# Altium PCB Line.PcbDoc
Units mm, origin at the board's own origin, x right, y up, seen from the top; angles counter-clockwise.
Board outline 55.25 x 23 mm, 2 copper layers (Top Layer, Bottom Layer); 22 components, 18 nets, 98 pads, 18 vias.
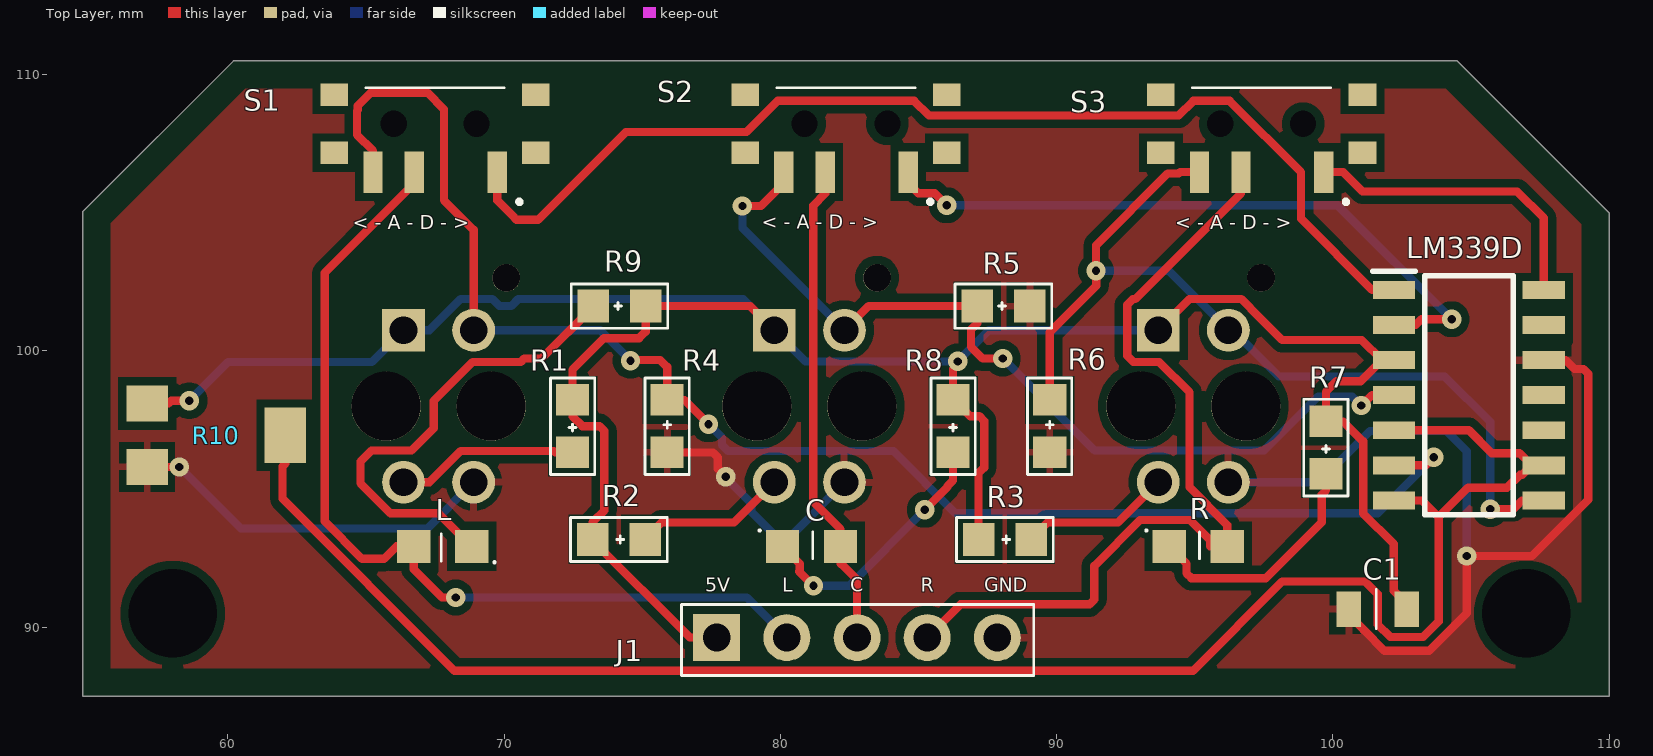
[diagram p0: Top Layer view]
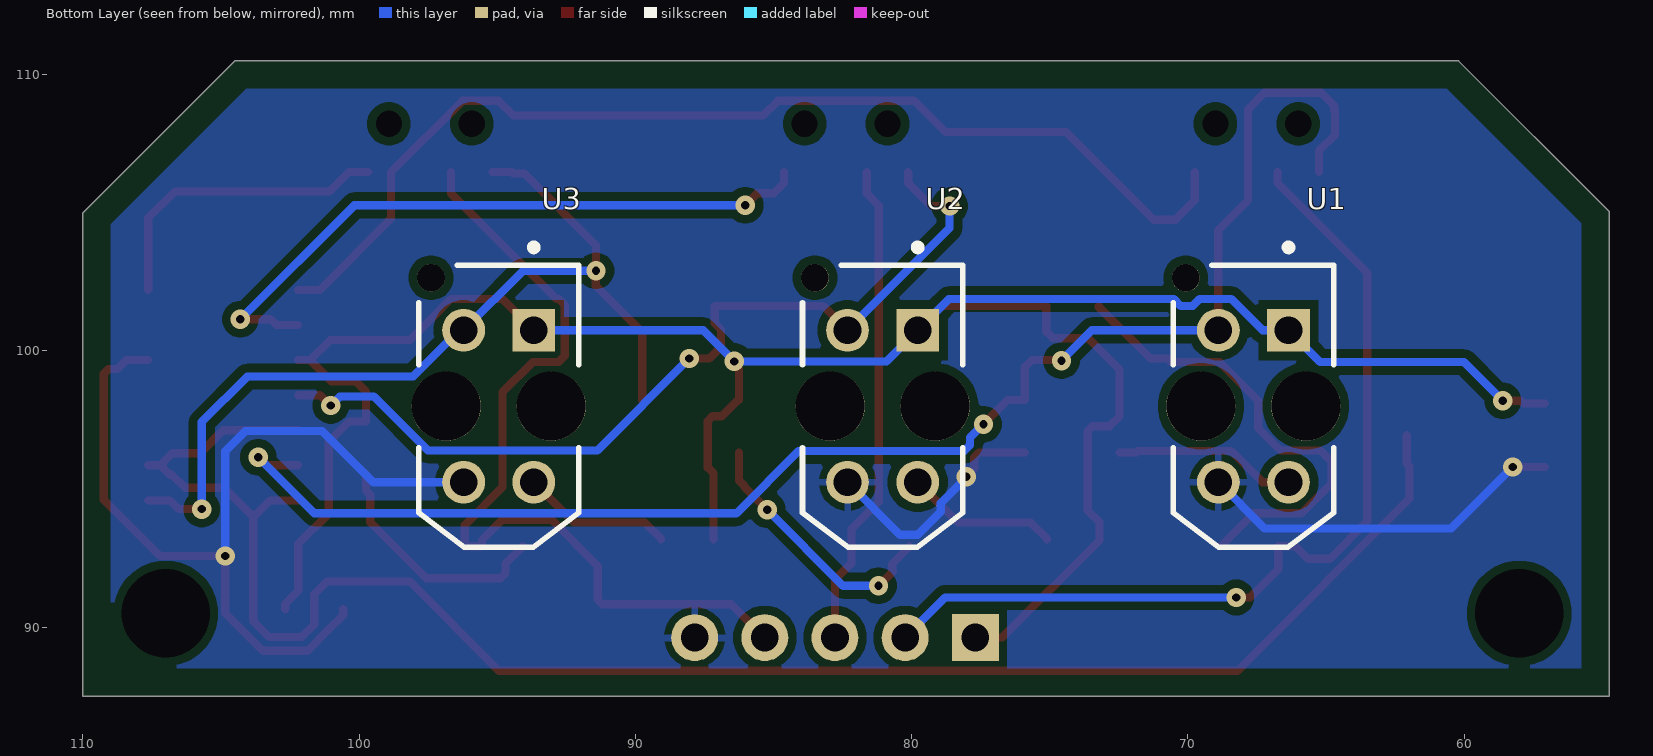
[diagram p1: Bottom Layer view, seen from below]
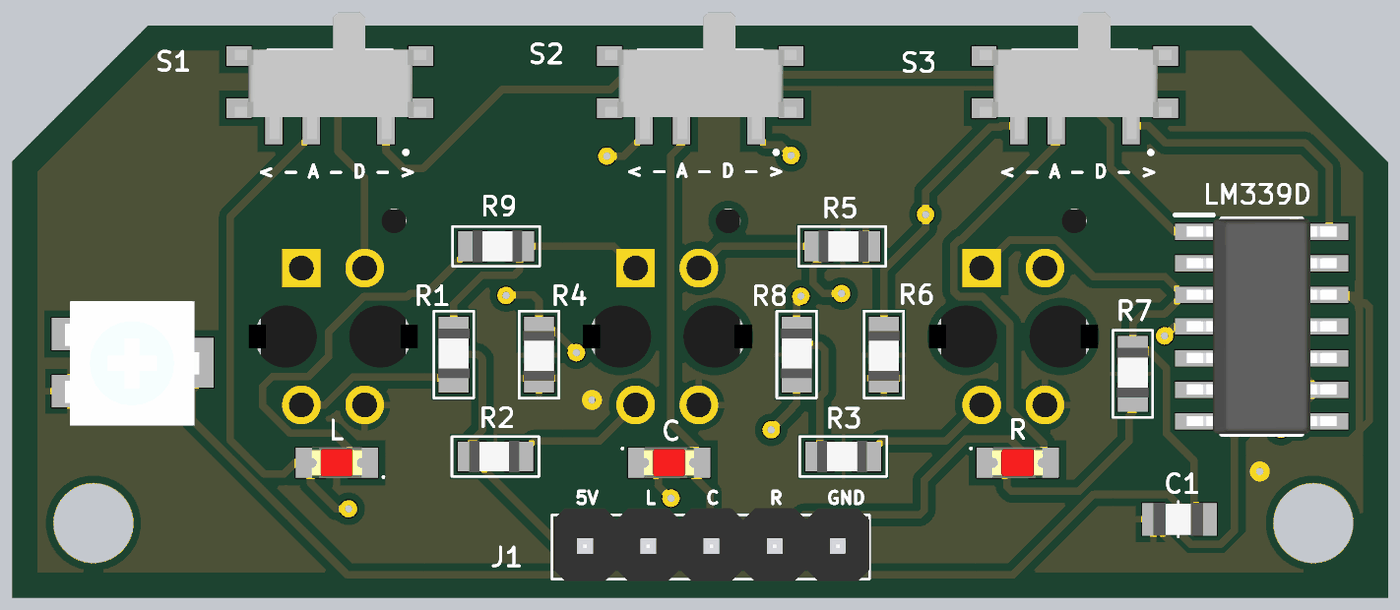
[diagram p2: 3D render of the assembled board from above, using the file's embedded part models]
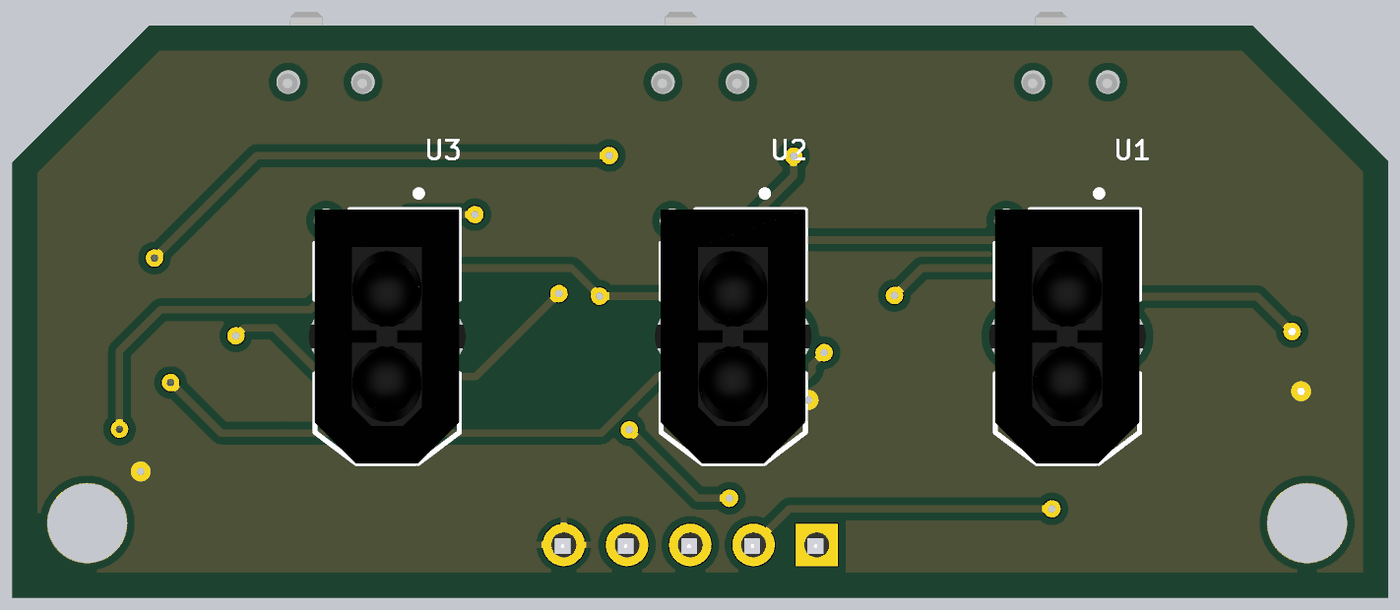
[diagram p3: 3D render of the assembled board from below, using the file's embedded part models]

## Layer stack, top to bottom
Top Solder: solder mask 0.0102, Solder Resist, Dk 3.5
Top Layer: signal copper 0.0356
Dielectric 1: dielectric 0.32, FR-4, Dk 4.8
Bottom Layer: signal copper 0.0356
Bottom Solder: solder mask 0.0102, Solder Resist, Dk 3.5

## Board outline
54.75,87.5 110,87.5 110,105 104.512,110.487 104.5,110.5 60.2,110.5 54.762,105.063 54.75,105.05

## Design rules (kind name [scope] priority, off if disabled: settings)
AcuteAngle [All] p1: minimum=6.00000000000000E+0001 checktracksonly=TRUE
AssemblyTestPointUsage [(not InNetClass('NOTESTPOINTS'))] p1: allowmultiple=TRUE
AssemblyTestPointUsage AssemblyTestPointUsageN [InNetClass('NOTESTPOINTS')] p2: valid=2 allowmultiple=TRUE
AssemblyTestpoint [All] p1: testpointundercomponent=TRUE minsize=0.8 maxsize=2 preferedsize=1 minholesize=0 maxholesize=0.35 preferedholesize=0 testpointgrid=1.27 usegrid=FALSE gridoriginx=87.5 gridoriginy=62.5 gridtolerance=0 allowsidetop=TRUE minspacing=2.54 // Zollner
BoardOutlineClearance BoardCopperOutlineClearance [(OnLayer('Top Layer') OR OnLayer('Bottom Layer') )] p1: gap=0.5 ignorepadtopadclearanceinfootprint=FALSE except(0.75: THPad-OutlineEdge; 0.8: SMDPad-OutlineEdge; 1: Poly-OutlineEdge Region-OutlineEdge)
Clearance PadToViaClearance [IsVia and not IsComponentVia vs IsPad] p1: gap=0.025 ignorepadtopadclearanceinfootprint=TRUE
Clearance "Clearance (FAB)" [All] p2: gap=0.203 ignorepadtopadclearanceinfootprint=TRUE except(0.305: Arc-Poly Track-Poly SMDPad-Poly THPad-Poly Via-Poly Fill-Poly Poly-Poly)
ComponentClearance ComponentClearance_NetTie [((ObjectKind = 'Component') And (ComponentType = 'Net Tie')) Or (Footprint = 'StarPoint') Or (Footprint like 'NetTieVia*')] p1: gap=-3.81 collisioncheckmode=3 verticalgap=-3.81 showdistances=FALSE
ComponentClearance [All] p2: gap=0.254 collisioncheckmode=3 verticalgap=0.254 showdistances=FALSE
DiffPairsRouting [All] p1: maxlimit=1.27 minlimit=0.203 mostfreqgap=0.203 toplayer_minwidth=0.152 toplayer_maxwidth=2.54 toplayer_prefwidth=0.254 bottomlayer_minwidth=0.152 bottomlayer_maxwidth=2.54 bottomlayer_prefwidth=0.254 maxuncoupledlength=12.7
FabricationTestPointUsage [All] p1: valid=2 allowmultiple=FALSE
FabricationTestpoint [All] p1: side=3 testpointundercomponent=TRUE minsize=1.016 maxsize=2.54 preferedsize=1.524 minholesize=0 maxholesize=1.016 preferedholesize=0.813 testpointgrid=0.025 allowsidetop=TRUE allowsidebottom=TRUE usegrid=FALSE gridtolerance=0
HoleSize [All] p1: absolutevalues=TRUE maxlimit=6.35 minlimit=0.3 maxpercent=80.000 minpercent=20.000 // Zollner
HoleToHoleClearance HoleToHoleClearance_NetTieVia [InPadClass('NetTieVias') vs InPadClass('NetTieVias')] p1: gap=0 allowstackedmicrovias=TRUE
HoleToHoleClearance [All] p2: gap=0.25 allowstackedmicrovias=TRUE // Zollner
MinimumAnnularRing [All] p1: minimumring=0.15 // PCBWAY
MinimumSolderMaskSliver [All] p1: minsoldermaskwidth=0.2 // Zollner
PlaneClearance PlaneClearance_1 [All] p1: clearance=0.508
PlaneConnect [All] p1: pad.planeconnectstyle=Relief pad.reliefexpansion=0.508 pad.reliefentries=4 pad.reliefconductorwidth=0.254 pad.reliefairgap=0.254 via.planeconnectstyle=Direct via.reliefexpansion=0.508 via.reliefentries=4 via.reliefconductorwidth=0.254 via.reliefairgap=0.254
PolygonConnect [All] p1: thpad.connectstyle=Relief thpad.reliefconductorwidth=0.254 thpad.reliefentries=4 thpad.polygonreliefangle="90 Angle" thpad.airgapwidth=0.254 smdpad.connectstyle=Relief smdpad.reliefconductorwidth=0.254 smdpad.reliefentries=4 smdpad.polygonreliefangle="90 Angle" smdpad.airgapwidth=0.254 via.connectstyle=Direct via.reliefconductorwidth=0.254 via.reliefentries=4 via.polygonreliefangle="90 Angle" via.airgapwidth=0.254
RoutingVias [All] p1: holewidth=0.3 width=0.7 viastyle="Through Hole" minholewidth=0.3 minwidth=0.6 maxholewidth=1.27 maxwidth=1.27
SMDEntry [not IsTestpoint] p1: side=TRUE corner=TRUE anyangle=FALSE
SMDNeckDown [not IsTestpoint] p1: percent=90.000
SMDToCorner [All] p1: distance=10000
SMDToPlane [All] p1: distance=0
ShortCircuit [All vs not IsBoardCutoutRegion] p1: allowed=FALSE
SilkToSolderMaskClearance [IsPad] p1: minsilkscreentomaskgap=0.127 clearancetoexposedcopper=TRUE
SolderMaskExpansion [All] p1: expansion=0.05 istentingtop=FALSE // Zollner
SolderMaskExpansion SolderMaskExpansionToHoles [All] p2: expansion=0.1 istentingtop=FALSE soldermaskfromhole=TRUE // Zollner
UnRoutedNet [All] p1: checkbadconnections=TRUE
Width [All] p1: maxlimit=12.7 minlimit=0.203 preferedwidth=0.3 minimp=50.000000 maximp=50.000000 favimp=50.000000
16 further rules are at their usual default settings.

## Components (designator, comment, footprint, x,y, rotation, side; value= is the part's Value field where it differs from the comment)
C "LED 0805" "LED 0805" 80.075,92.925 r0 top (schematic designator D2)
C1 "100nF" C0805 102.775,90.65 r180 top
J1 "1x5 MALE HEADER" "1X5 MALE HEADER" 82.775,89.6 r0 top
L "LED 0805" "LED 0805" 68.825,92.925 r180 top (schematic designator D3)
LM339D "LM339D" LM339D 104.925,98.4 r0 top (schematic designator U4)
R "LED 0805" "LED 0805" 94.075,92.925 r0 top (schematic designator D1)
R1 "220" "R0805 RESISTOR" 72.475,98.225 r270 top
R2 "220" "R0805 RESISTOR" 73.2,93.175 r0 top
R3 "220" "R0805 RESISTOR" 87.175,93.175 r0 top
R4 "10k" "R0805 RESISTOR" 75.9,96.325 r90 top
R5 "10k" "R0805 RESISTOR" 89.025,101.625 r180 top
R6 "10k" "R0805 RESISTOR" 89.75,96.325 r90 top
R7 "220" "R0805 RESISTOR" 99.75,97.45 r270 top
R8 "220" "R0805 RESISTOR" 86.25,98.225 r270 top
R9 "220" "R0805 RESISTOR" 75.125,101.625 r180 top
R10 "TRIMPOT 5mm" "TRIMPOT 5MM" 56.95,100.05 r270 top
S1 "SMD SLİDE SWİTCH" "SMD SLIDE SWITCH" 67.627,108.225 r180 top
S2 "SMD SLİDE SWİTCH" "SMD SLIDE SWITCH" 82.5,108.225 r180 top
S3 "SMD SLİDE SWİTCH" "SMD SLIDE SWITCH" 97.55,108.225 r180 top
U1 "TCRT5000" TCRT5000 67.625,98 r270 bottom
U2 "TCRT5000" TCRT5000 81.05,98 r270 bottom
U3 "TCRT5000" TCRT5000 94.95,98 r270 bottom

## Footprints (in the part's own frame and the unit in brackets; to place one, negate y for a bottom-side part, rotate by r counter-clockwise, add the part's x,y. Pads: shape width x height; smd on the part's side, far side on the other; paste and mask are expansions set on the pad)
"1X5 MALE HEADER" [mm]
  rect 1.7x1.7 hole 1 mask+0.05: 1(-5.08,0.025)
  round 1.7 hole 1 mask+0.05: 2(-2.54,0.025) 3(0,0.025) 4(2.54,0.025) 5(5.08,0.025)
  silkscreen extent -6.35,-1.35 6.4,1.23, body extent -6.3,-1.43 6.4,1.49, height 8.51
C0805 [mm] "C0805 CAPACITOR"
  rect 0.9x1.3 smd: 1(0.1,0) 2(2.2,0)
  silkscreen extent 1.2,-0.72 1.2,0.7, body extent 0.2,-0.66 2.2,0.65, height 0.73
"LED 0805" [mm]
  rect 1.2x1.2 smd: 1(0,0) 2(2.1,0)
  silkscreen extent -0.85,-0.45 1.1,0.6, body extent 0.04,-0.63 2.06,0.63, height 1.1
LM339D [mm] "LM339 Comparator"
  rect 1.525x0.65 smd: 1(-2.712,3.81) 2(-2.712,2.54) 3(-2.712,1.27) 4(-2.712,0) 5(-2.712,-1.27) 6(-2.712,-2.54) 7(-2.712,-3.81) 8(2.712,-3.81) 9(2.712,-2.54) 10(2.712,-1.27) 11(2.712,0) 12(2.712,1.27) 13(2.712,2.54) 14(2.712,3.81)
  silkscreen extent -3.48,-4.33 1.6,4.48, body extent -3.01,-4.32 3.01,4.34, height 1.75
"R0805 RESISTOR" [mm]
  rect 1.14x1.2 smd: 1(0,0) 2(1.9,0)
  silkscreen extent -0.8,-0.8 2.7,0.8, body extent -0.1,-0.63 1.9,0.63, height 0.43
"SMD SLIDE SWITCH" [mm] "SMD Slide Switch right angle"
  rect 0.7x1.5 smd: 1(2.377,1.75) 2(0.877,1.75) 3(-2.123,1.75)
  rect 1x0.8 smd: GND(-3.523,-1.05) GND(-3.523,1.05) GND(3.777,-1.05) GND(3.777,1.05)
  round 0.475 hole 0.95 unplated: MH1(-1.373,0) MH2(1.627,0)
  silkscreen extent -2.97,-1.3 2.63,2.88, body extent -3.75,-2.8 3.95,2.29, height 1.4
TCRT5000 [mm] "TCRT5000 Kızıl Ötesi Sensör"
  rect 1.55x1.55 hole 1 paste-1000 mask+0: 1(-2.75,1.27)
  round 1.55 hole 1 paste-1000 mask+0: 2(2.75,1.27) 3(-2.75,-1.27) 4(2.75,-1.27)
  round 1 hole 1 unplated paste-1000 mask+0: ""(-4.65,-2.45)
  round 2.5 hole 2.5 unplated paste-1000 mask+0: ""(0,-1.9) ""(0,1.9)
  silkscreen extent -5.87,-2.9 5.1,2.9, body extent -5.1,-3.41 5.1,3.39, height 7.13
"TRIMPOT 5MM" [mm] "5mm Square Trimpot"
  rect 1.3x1.5 smd mask+0.05: 1(4.25,0.125) 3(1.95,0.125)
  rect 2x1.5 smd mask+0.05: 2(3.1,5.125)
  body extent 0.63,-0.1 5.63,5.3, height 2.8

## Part data
C1: library part C0805
LM339D: "LM33D Voltage Comparator"
R1 R2 R3 R4 R5 R6 R7 R8 R9: library part "R0805 Resistor"
R10: "TS53 TRIMPOT SMD 5mm"
U1 U2 U3: "TCRT5000 Kızıl Ötesi Sensör", Current - Collector=100mA, Current - DC Forward=60mA, Digikey Part Number=751-1033-5-ND, Manufacturer=Vishay, Mouser Part Number=782-TCRT5000, Package=PTH_SENSOR_10MM2_5MM8, Temperature="-25°C to +85°C", Temperature Range High=+85°C, Temperature Range Low=-25°C, Voltage - Collector Emitter Breakdown=70V, ComponentLink1Description=Upverter, ComponentLink1URL=https://upverter.com/upn/revision/6a006743d406fff5/, ComponentLink2Description=Datasheet, ComponentLink2URL=http://www.vishay.com/doc?83760, Digikey Description="IC SENSOR OPTO TRANS 15MM REFL PCB", helpURL=https://upverter.com/upn/revision/6a006743d406fff5/, Lead Free=yes, Part Number=TCRT5000, Price=0.712554698297, RoHS=TRUE, Supplier 1=Digi-Key, Supplier 2=Mouser, Supplier Part Number 1=751-1033-5-ND, Supplier Part Number 2=782-TCRT5000

## Free pads (board coordinates)
  oval 0.55x0.5 hole 3.2 mask+0.05: 4(58,90.5) 5(107,90.5)

## Via types
v1: diameter 0.7, hole 0.3, Top Layer to Bottom Layer, 18 vias

## Nets (pads, with @x,y where several pads share a name; then routed paths per layer and width w, separated by ;. In a path a pad name is that pad's centre, name@x,y a point inside that pad or via, vN(x,y) a via of type N, cw(c..) or ccw(c..) an arc to the next point about the centre after c; other vN are vias at no path point)
+5: C1.1 J1.1 LM339D.3 R1.1 R2.1 R3.1 R7.1 R8.1 R9.1 R10.3 U1.1 U2.1 U3.1 | length 91.2
  Top Layer w0.3: R10.3 57.85,98.1 57.95,98.2 v1(58.6,98.2) ; J1.1 76.72,89.625 73.2,93.145 R2.1 73.2,93.8 73.625,94.225 73.625,97.099 73.449,97.275 72.83,97.275 72.475,97.63 72.475,99.325 73.612,100.462 74.888,100.462 75.125,100.7 75.125,101 R9.1 78.905,101.625 U2.1 ; v1(86.418,99.622) 86.418,99.514 86.25,99.346 R8.1 86.28,98.225 86.868,97.637 87.199,97.637 87.375,97.461 87.375,95.775 87.175,95.575 R3.1 ; U3.1 94.808,101.878 96.687,101.878 97.348,101.217 98.166,100.4 101.046,100.4 LM339D.3@101.776,99.67 ; LM339D.3 LM339D.3@101.776,99.67 ; C1.1 102.675,90.85 102.207,91.318 102.207,93.009 101.097,94.119 101.097,96.728 100.375,97.45 R7.1 99.75,98.525 100.131,98.906 101.011,98.906 LM339D.3@101.776,99.67
  Bottom Layer w0.3: v1(58.6,98.2) 60.003,99.603 65.208,99.603 U1.1 67.299,100.75 68.428,101.878 69.572,101.878 69.825,101.625 70.257,101.625 70.51,101.878 78.652,101.878 U2.1 80.908,99.622 v1(86.418,99.622) 87.546,100.75 U3.1
CENTER_A: LM339D.4 R5.2 S2.1 U2.3 | length 33
  Top Layer w0.3: v1(78.625,105.25) 79.298,105.25 80.123,106.075 S2.1 ; U2.3 83.195,101.625 R5.2 87.125,101 86.9,100.775 86.9,100.15 87.325,99.725 v1(88.05,99.725) ; v1(101.025,98.025) 101.05,98.025 101.425,98.4 LM339D.4
  Bottom Layer w0.3: v1(78.625,105.25) 78.625,104.445 U2.3 ; v1(88.05,99.725) 91.378,96.397 97.514,96.397 99.467,98.35 100.7,98.35 v1(101.025,98.025)
CENTER_D: LM339D.2 S2.3 | length 24.3
  Top Layer w0.3: S2.3 84.623,106.075 84.991,105.707 85.593,105.707 v1(86.025,105.275) ; LM339D.2 103.001,100.94 103.211,101.15 v1(104.3,101.15)
  Bottom Layer w0.3: v1(86.025,105.275) 100.175,105.275 v1(104.3,101.15)
CENTER_SIGNAL: C.2 J1.3 S2.2 | length 17.7
  Top Layer w0.3: S2.2 81.623,105.7 81.192,105.268 81.192,94.534 82.175,93.55 C.2 82.175,92.3 ; J1.3 82.775,91.725 82.2,92.3 ; 82.175,92.3 82.2,92.3 ; 82.175,92.3 82.2,92.3
CMPR: LM339D.5 LM339D.7 LM339D.9 R10.2 | length 66.1
  Top Layer w0.3: R10.2 62.075,95.925 61.975,95.825 61.975,94.65 68.203,88.422 94.933,88.422 98.165,91.653 101.171,91.653 101.625,91.2 101.625,90.101 102.079,89.647 103.271,89.647 103.832,90.207 103.832,93.982 ; LM339D.7 103.224,94.59 103.832,93.982 ; LM339D.5 104.92,97.13 105.75,96.3 106.76,96.3 107.115,95.945 107.115,95.86 LM339D.9 107.2,95.86 106.857,95.517 106.772,95.517 106.305,95.05 104.9,95.05 103.832,93.982
GND: C1.2 J1.5 LM339D.12 R4.1 R5.1 R6.1 R10.1 U1.4 U2.4 U3.4 | length 55.1
  Top Layer w0.3: R10.1 v1(58.242,95.8) ; R4.1 77.556,96.325 77.736,96.145 77.736,95.739 v1(78.025,95.45) ; C1.2 100.575,90.45 101.122,89.903 101.122,89.892 101.87,89.144 103.48,89.144 104.85,90.514 v1(104.85,92.575) 107.209,92.575 109.25,94.616 109.25,99.174 109.074,99.35 108.745,99.35 108.425,99.67 LM339D.12
  Bottom Layer w0.3: v1(58.242,95.8) 60.469,93.574 67.219,93.574 U1.4 ; v1(78.025,95.45) 78.025,95.409 78.941,94.493 78.941,94.185 79.781,93.345 80.415,93.345 U2.4 ; U3.4 99.492,95.25 101.342,97.1 104.119,97.1 104.85,96.369 v1(104.85,92.575)
LEFT_A: LM339D.6 R4.2 S1.1 U1.3 | length 55.4
  Top Layer w0.3: S1.1 65.25,107.25 64.675,107.825 64.675,108.701 64.703,108.729 64.703,108.878 65.174,109.349 67.226,109.349 67.825,108.75 67.825,105.454 68.895,104.384 U1.3 ; v1(74.575,99.65) 74.6,99.675 75.65,99.675 75.9,99.425 R4.2 76.525,98.225 v1(77.4,97.35) ; LM339D.6 103.36,95.86 v1(103.65,96.15)
  Bottom Layer w0.3: U1.3 73.475,100.75 v1(74.575,99.65) ; v1(77.4,97.35) 77.885,96.865 77.885,96.59 78.097,96.378 84.091,96.378 86.348,94.122 101.622,94.122 v1(103.65,96.15)
LEFT_D: LM339D.1 S1.3 | length 39.8
  Top Layer w0.3: S1.3 69.75,105.45 70.301,104.899 70.45,104.75 71.225,104.75 74.403,107.928 78.776,107.928 79.901,109.053 84.845,109.053 85.377,108.522 94.419,108.522 94.951,109.053 96.266,109.053 98.846,106.474 98.846,104.79 101.425,102.21 LM339D.1
LEFT_SIGNAL: J1.2 L.2 S1.2 | length 33.3
  Top Layer w0.3: S1.2 66.75,106.075 63.5,102.825 63.5,93.837 64.862,92.475 65.65,92.475 66.1,92.925 L.2 66.725,92.1 67.75,91.075 v1(68.25,91.075)
  Bottom Layer w0.3: v1(68.25,91.075) 78.785,91.075 J1.2
NetD1_1: R7.2 R.1 | length 8.9
  Top Layer w0.3: R.1 94.7,92.3 94.7,91.951 94.876,91.775 97.575,91.775 99.6,93.8 99.6,94.805 99.75,94.955 R7.2
NetD2_1: C.1 R8.2 | length 9.6
  Top Layer w0.3: C.1 80.7,92.3 80.7,92.036 80.682,92.018 v1(81.2,91.5) ; v1(85.225,94.25) 86.05,95.075 86.05,95.113 86.25,95.313 86.25,95.729 R8.2
  Bottom Layer w0.3: v1(81.2,91.5) 82.475,91.5 v1(85.225,94.25)
NetD3_1: L.1 R9.2 | length 17.1
  Top Layer w0.3: L.1 67.628,94.122 65.888,94.122 64.8,95.209 64.8,96 65.197,96.397 66.647,96.397 67.45,97.2 67.45,98.192 68.861,99.603 70.603,99.603 70.725,99.725 71.355,99.725 73.225,101.595 R9.2
NetR1_2: R1.2 U1.2 | length 6.6
  Top Layer w0.3: U1.2 67.299,95.25 68.428,96.378 71.796,96.378 71.85,96.325 R1.2
NetR2_2: R2.2 U2.2 | length 5.6
  Top Layer w0.3: R2.2 75.1,93.205 75.688,93.793 78.323,93.793 U2.2
NetR3_2: R3.2 U3.2 | length 5.5
  Top Layer w0.3: R3.2 89.075,93.205 89.663,93.793 92.223,93.793 U3.2
RIGHT_A: LM339D.8 R6.2 S3.1 U3.3 | length 32.9
  Top Layer w0.3: R6.2 89.75,100.675 91.434,102.359 91.434,102.891 v1(91.425,102.9) 91.425,103.825 94.022,106.422 94.419,106.422 94.473,106.475 S3.1 ; v1(105.7,94.275) 106.534,94.275 106.849,94.59 LM339D.8
  Bottom Layer w0.3: v1(91.425,102.9) 94.07,102.9 U3.3 96.367,100.75 98.042,99.075 104.05,99.075 105.7,97.425 v1(105.7,94.275)
RIGHT_D: LM339D.14 S3.3 | length 11.3
  Top Layer w0.3: S3.3 100.373,106.475 101.074,105.775 106.675,105.775 107.637,104.813 LM339D.14
RIGHT_SIGNAL: J1.4 R.2 S3.2 | length 31.4
  Top Layer w0.3: J1.4 86.518,90.828 91.188,90.828 91.363,91.004 91.363,92.222 93.02,93.878 94.821,93.878 95.55,93.15 ; S3.2 96.673,105.7 92.852,101.878 92.759,101.878 92.552,101.671 92.552,99.829 92.777,99.603 93.714,99.603 94.808,98.509 94.808,95.066 96.175,93.699 R.2 95.55,92.925 ; 95.55,92.925 95.55,93.15 ; 95.55,92.925 95.55,93.15
pads on no net: LM339D.10 LM339D.11 LM339D.13 S1.GND S1.MH1 S1.MH2 S2.GND S2.MH1 S2.MH2 S3.GND S3.MH1 S3.MH2 U1. U2. U3.

## Polygon pours and split planes (outlines as drawn)
GND on Bottom Layer "GND_L02_P001" (solid, remove dead copper, pour order 1): 42.875,123.225 43.225,123.575 127.85,123.575 127.85,77.875 126.925,76.95 43.025,76.95 43.025,122.95 42.95,123.025
GND on Top Layer "GND_L01_P000" (solid, remove dead copper, pour order 0): 48.1,119.575 48.175,119.65 115.325,119.65 115.325,82.425 115.45,82.3 49.075,82.3 49.075,119.425 49,119.5

## Silkscreen, mask and mechanical layers (free items; w line width, h text height)
Top Overlay:
  text "< - A - D - >" at 79.325,104.425 h0.5
  text "< - A - D - >" at 64.525,104.4 h0.5
  text "< - A - D - >" at 94.3,104.4 h0.5
  text "5V" at 77.275,91.275 h0.5
  text "L" at 80.075,91.275 h0.5
  text "C" at 82.525,91.275 h0.5
  text "R" at 85.075,91.275 h0.5
  text "GND" at 87.375,91.275 h0.5
Mechanical 1:
  lines w0.1: 54.75,105.05 54.75,87.5 110,87.5 110,105 104.512,110.487 ; 54.762,105.063 60.2,110.5 104.5,110.5